# Altium PCB usb_convert.PcbDoc
Units mil, origin at the board's own origin, x right, y up, seen from the top; angles counter-clockwise.
Board outline 640 x 455 mil, 2 copper layers (Top Layer, Bottom Layer); 5 components, 6 nets, 34 pads, 9 vias.
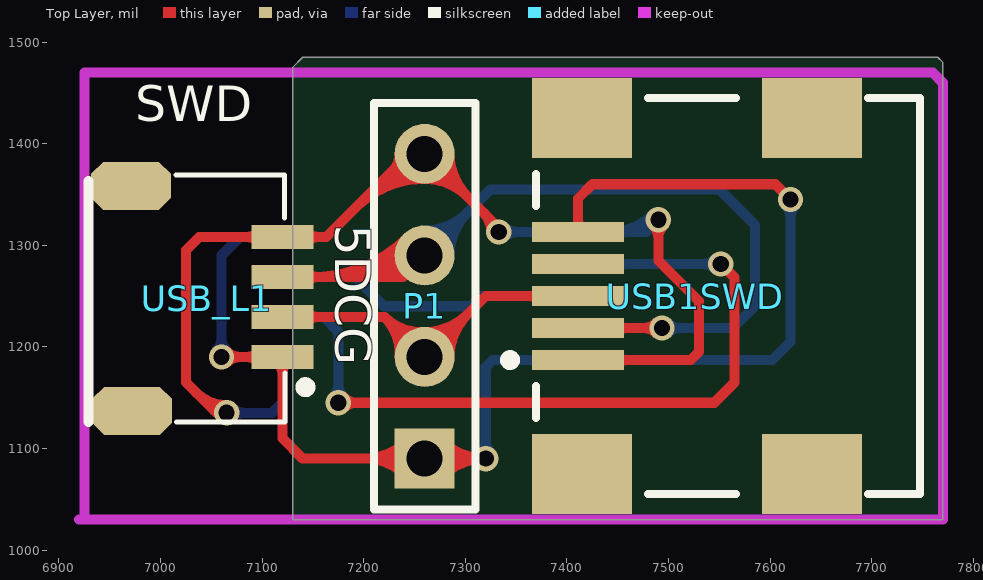
[diagram p0: Top Layer view]
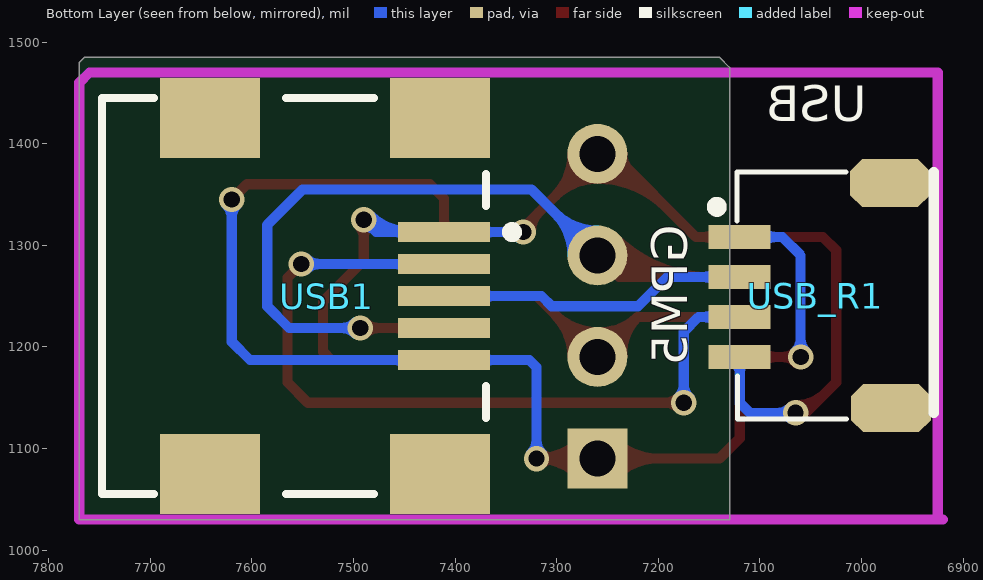
[diagram p1: Bottom Layer view, seen from below]

## Layer stack, top to bottom
Top Layer: signal copper 1.4
Dielectric: dielectric 12.6, FR-4, Dk 4.8
Bottom Layer: signal copper 1.4

## Board outline
7130,1030 7770,1030 7770,1480 7765,1485 7140,1485 7130,1475

## Design rules (kind name [scope] priority, off if disabled: settings)
Clearance [All] p1: gap=10
PolygonConnect [All] p1: connectstyle=Relief reliefconductorwidth=10 reliefentries=4 polygonreliefangle="90 Angle"
RoutingVias [All] p1: holewidth=28 width=50 viastyle="Through Hole" minholewidth=16 minwidth=25 maxholewidth=28 maxwidth=50
SilkscreenOverComponentPads [All] p1: minsilkscreentomaskgap=10
SolderMaskExpansion [All] p1: expansion=4
Width [All] p1: maxlimit=10 minlimit=10 preferedwidth=10
27 further rules are at their usual default settings.

## Components (designator, comment, footprint, x,y, rotation, side; value= is the part's Value field where it differs from the comment)
P1 "Header 4" HDR1X4 7260,1090 r90 top
USB1 "USB-B(Mini)" USB/SM0.8-6H5_M 7720,1250 r0 bottom
USB1SWD "USB-B(Mini)" USB/SM0.8-6H5_M 7720,1250 r0 top
USB_L1 "Header 4" SH1.0-4P 7120,1190 r90 top
USB_R1 "Header 4" SH1.0-4P 7120,1308.11 r270 bottom

## Footprints (in the part's own frame and the unit in brackets; to place one, negate y for a bottom-side part, rotate by r counter-clockwise, add the part's x,y. Pads: shape width x height; smd on the part's side, far side on the other; paste and mask are expansions set on the pad)
HDR1X4 [mm] "Connector; Header; 4 Position"
  rect 1.5x1.5 hole 0.9: 1(0,0)
  round 1.5 hole 0.9: 2(2.54,0) 3(5.08,0) 4(7.62,0)
  silkscreen extent -1.27,-1.27 8.89,1.27
SH1.0-4P [mm]
  rect 0.6x1.55 smd: 1(0,0) 2(1,0) 3(2,0) 4(3,0)
  oct 1.2x2 smd: A(-1.346,3.759) B(4.279,3.785)
  silkscreen extent -1.63,-0.7 4.55,4.85
USB/SM0.8-6H5_M [mm]
  rect 2.3x0.5 smd: 1(-7.85,-1.6) 2(-7.85,-0.8) 3(-7.85,0) 4(-7.85,0.8) 5(-7.85,1.6)
  rect 2.5x2 smd: 6(-7.75,4.45) 7(-1.996,4.45) 8(-7.75,-4.45) 9(-1.996,-4.45)
  silkscreen extent -9.67,-4.95 0.7,4.95

## Part data
P1 USB_L1 USB_R1: "Header, 4-Pin"
USB1 USB1SWD: library part USB5

## Via types
v1: diameter 25, hole 16, Top Layer to Bottom Layer, 9 vias

## Nets (pads, with @x,y where several pads share a name; then routed paths per layer and width w, separated by ;. In a path a pad name is that pad's centre, name@x,y a point inside that pad or via, vN(x,y) a via of type N, cw(c..) or ccw(c..) an arc to the next point about the centre after c; other vN are vias at no path point)
5V: P1.4 USB1.1 USB1SWD.1 USB_L1.4 USB_R1.4 | length 1845.8
  Top Layer w10: 7035.13,1154.87 ccw(c7065,1184.75) v1@7065,1142.5 ; 7052.2,1137.8 ccw(c7065,1150.61) v1@7065,1132.5 ; v1(7065,1135) 7055,1135 7025,1165 7025,1295 7038.11,1308.11 USB_L1.4 7163.11,1308.11 7245,1390 P1.4 7332.99,1317.01 v1(7332.99,1312.99) ; USB_L1.4@7096.48,1303.29 ccw(c7084.86,1291.67) 7084.86,1308.11 ccw(c7084.86,1324.55) USB_L1.4@7096.48,1312.93 ; USB_L1.4@7143.52,1303.29 cw(c7155.14,1291.67) 7155.14,1308.11 cw(c7155.14,1324.55) USB_L1.4@7143.52,1312.93 ; 7192.52,1337.52 cw(c7260,1270.04) 7260,1365.47 cw(c7260,1306.26) 7301.87,1348.13 cw(c7343.74,1390) P1.4@7284.53,1390 ; 7209.59,1354.59 cw(c7260,1304.19) 7260,1375.47 cw(c7260,1340.4) 7284.8,1365.2 cw(c7309.6,1390) P1.4@7274.53,1390 ; 7226.66,1371.66 cw(c7260,1338.33) P1.4@7260,1385.47 ; 7228.74,1373.74 ccw(c7212.47,1390) P1.4@7235.47,1390 ; 7317.35,1332.65 cw(c7297.69,1312.99) v1@7325.49,1312.99 ; USB1SWD.1 7522.01,1187.01 7530,1195 7530,1245 7490,1285 v1(7490,1325) ; USB1SWD.1@7449.8,1183.58 cw(c7458.07,1175.32) 7458.07,1187.01 cw(c7458.07,1198.7) USB1SWD.1@7449.8,1190.43 ; v1@7484.7,1319.7 cw(c7471.89,1306.89) 7490,1306.89 cw(c7508.11,1306.89) v1@7495.3,1319.7
  Bottom Layer w10: v1(7065,1135) 7110,1135 7120,1145 USB_R1.4 ; v1@7070.3,1129.7 cw(c7083.11,1116.89) 7083.11,1135 cw(c7083.11,1153.11) v1@7070.3,1140.3 ; USB_R1.4@7115.18,1185.18 cw(c7103.56,1173.56) 7120,1173.56 cw(c7136.44,1173.56) USB_R1.4@7124.82,1185.18 ; v1(7332.99,1312.99) 7350,1312.99 ; v1@7338.3,1307.69 cw(c7351.1,1294.89) 7351.1,1312.99 cw(c7351.1,1331.1) v1@7338.3,1318.3 ; USB1.1@7372.09,1309.57 ccw(c7363.82,1301.3) 7363.82,1312.99 ccw(c7363.82,1324.68) USB1.1@7372.09,1316.42 ; USB1.1@7442.9,1312.99 ccw(c7442.9,1372.1) v1@7484.7,1330.3 ; USB1.1@7449.8,1309.57 cw(c7458.07,1301.3) 7458.07,1312.99 cw(c7458.07,1324.68) USB1.1@7449.8,1316.42 ; 7467.05,1312.99 ccw(c7467.05,1347.95) v1@7491.77,1323.23 ; v1(7490,1325) 7477.99,1312.99 USB1.1 7350,1312.99 ; 7350,1312.99 cw(c7350,1328.53) 7338.53,1318.05 ccw(c7350,1328.53) 7350,1312.99 ; 7350,1312.99 ccw(c7350,1297.46) 7338.53,1307.93 cw(c7350,1297.46) 7350,1312.99
DM: USB1.2 USB_R1.3 | length 921.4
  Top Layer w10: v1(7175,1145) 7545,1145 7565,1165 7565,1268 v1(7551.5,1281.5) ; v1@7180.3,1139.7 cw(c7193.11,1126.89) 7193.11,1145 cw(c7193.11,1163.11) v1@7180.3,1150.3
  Bottom Layer w10: USB_R1.3 7160.63,1229.37 7175,1215 v1(7175,1145) ; USB_R1.3@7143.52,1224.55 cw(c7155.14,1212.93) 7155.14,1229.37 cw(c7155.14,1245.81) USB_R1.3@7143.52,1234.19 ; v1@7169.7,1150.3 ccw(c7156.89,1163.11) 7175,1163.11 ccw(c7193.11,1163.11) v1@7180.3,1150.3 ; USB1.2 7515,1281.5 v1(7551.5,1281.5) ; USB1.2@7449.8,1278.07 cw(c7458.07,1269.81) 7458.07,1281.5 cw(c7458.07,1293.19) USB1.2@7449.8,1284.92 ; v1@7546.19,1276.19 ccw(c7533.39,1263.39) 7533.39,1281.5 ccw(c7533.39,1299.6) v1@7546.19,1286.8
DP: USB1.3 USB_R1.2 | length 351.2
  Bottom Layer w10: USB_R1.2 7191.26,1268.74 7220,1240 7305,1240 7315,1250 USB1.3 ; USB_R1.2@7143.52,1263.92 cw(c7155.14,1252.3) 7155.14,1268.74 cw(c7155.14,1285.18) USB_R1.2@7143.52,1273.56 ; USB1.3@7372.09,1246.58 ccw(c7363.82,1238.31) 7363.82,1250 ccw(c7363.82,1261.69) USB1.3@7372.09,1253.43
GND: P1.1 USB1.5 USB1SWD.5 USB_L1.1 USB_R1.1 | length 1881.2
  Top Layer w10: v1(7060,1190) USB_L1.1 7120,1110 7140,1090 P1.1 v1(7320,1090) ; v1@7065.3,1184.7 cw(c7078.11,1171.89) 7078.11,1190 cw(c7078.11,1208.11) v1@7065.3,1195.3 ; USB_L1.1@7096.48,1185.18 ccw(c7084.86,1173.56) 7084.86,1190 ccw(c7084.86,1206.44) USB_L1.1@7096.48,1194.82 ; USB_L1.1@7115.18,1185.18 cw(c7103.56,1173.56) 7120,1173.56 cw(c7136.44,1173.56) USB_L1.1@7124.82,1185.18 ; P1.1@7242.66,1072.66 ccw(c7200.79,1030.79) 7200.79,1090 ccw(c7200.79,1149.21) P1.1@7242.66,1107.34 ; P1.1@7249.73,1079.73 ccw(c7224.93,1054.93) 7224.93,1090 ccw(c7224.93,1125.07) P1.1@7249.73,1100.27 ; P1.1@7270.27,1079.73 cw(c7295.07,1054.93) 7295.07,1090 cw(c7295.07,1125.07) P1.1@7270.27,1100.27 ; P1.1@7277.34,1072.66 cw(c7319.21,1030.79) 7319.21,1090 cw(c7319.21,1149.21) P1.1@7277.34,1107.34 ; v1@7314.7,1084.7 ccw(c7301.89,1071.89) 7301.89,1090 ccw(c7301.89,1108.11) v1@7314.7,1095.3 ; USB1SWD.5@7407.52,1316.41 ccw(c7399.25,1324.68) 7410.94,1324.68 ccw(c7422.63,1324.68) USB1SWD.5@7414.37,1316.41 ; USB1SWD.5 7410.94,1345.94 7425,1360 7605,1360 v1(7620,1345)
  Bottom Layer w10: v1@7054.7,1195.3 ccw(c7041.89,1208.11) 7060,1208.11 ccw(c7078.11,1208.11) v1@7065.3,1195.3 ; v1(7060,1190) 7060,1290 7078.11,1308.11 USB_R1.1 ; USB_R1.1@7096.48,1303.29 ccw(c7084.86,1291.67) 7084.86,1308.11 ccw(c7084.86,1324.55) USB_R1.1@7096.48,1312.93 ; v1@7314.7,1095.3 ccw(c7301.89,1108.11) 7320,1108.11 ccw(c7338.11,1108.11) v1@7325.3,1095.3 ; v1(7320,1090) 7320,1180 7327.01,1187.01 USB1.5 7602.01,1187.01 7620,1205 v1(7620,1345) ; USB1.5@7372.09,1183.59 ccw(c7363.82,1175.32) 7363.82,1187.01 ccw(c7363.82,1198.7) USB1.5@7372.09,1190.43 ; USB1.5@7449.8,1183.59 cw(c7458.07,1175.32) 7458.07,1187.01 cw(c7458.07,1198.7) USB1.5@7449.8,1190.43 ; v1@7614.7,1339.7 cw(c7601.89,1326.89) 7620,1326.89 cw(c7638.11,1326.89) v1@7625.3,1339.7
SCK: P1.2 USB1SWD.3 USB_L1.2 | length 659
  Top Layer w10: USB_L1.2 7220.63,1229.37 ; USB_L1.2@7143.52,1224.55 cw(c7155.14,1212.93) 7155.14,1229.37 cw(c7155.14,1245.81) USB_L1.2@7143.52,1234.19 ; P1.2@7235.5,1191.09 ccw(c7184.62,1193.36) 7220.63,1229.37 ; P1.2@7245.49,1190.65 ccw(c7215.36,1191.99) 7236.68,1213.32 ccw(c7258.01,1234.64) P1.2@7259.35,1204.51 ; P1.2@7258.91,1214.5 cw(c7256.64,1265.38) 7220.63,1229.37 ; P1.2@7260,1204.53 ccw(c7260,1239.6) 7284.8,1214.8 ccw(c7309.6,1190) P1.2@7274.53,1190 ; P1.2@7260,1214.53 ccw(c7260,1273.74) 7301.87,1231.87 ccw(c7343.74,1190) P1.2@7284.53,1190 ; USB1SWD.3@7372.09,1246.57 ccw(c7363.82,1238.31) 7363.82,1250 ccw(c7363.82,1261.69) USB1SWD.3@7372.09,1253.42 ; USB1SWD.3 7320,1250 P1.2 7220.63,1229.37
SWD: P1.3 USB1SWD.2 USB_L1.3 | length 1327.7
  Top Layer w10: USB_L1.3 7238.74,1268.74 P1.3 ; USB_L1.3@7143.52,1263.92 cw(c7155.14,1252.3) 7155.14,1268.74 cw(c7155.14,1285.18) USB_L1.3@7143.52,1273.56 ; USB_L1.3@7149.46,1268.74 ccw(c7149.46,1400.54) P1.3@7242.66,1307.34 ; 7173.6,1268.74 ccw(c7173.6,1376.4) P1.3@7249.73,1300.27 ; 7197.74,1268.74 ccw(c7197.74,1352.26) P1.3@7256.8,1293.2 ; 7221.89,1268.74 ccw(c7221.89,1328.11) P1.3@7263.87,1286.13 ; USB1SWD.2 v1(7493.5,1218.5) ; USB1SWD.2@7449.8,1215.08 cw(c7458.07,1206.81) 7458.07,1218.5 cw(c7458.07,1230.19) USB1SWD.2@7449.8,1221.93 ; v1@7488.2,1213.2 ccw(c7475.4,1200.4) 7475.4,1218.5 ccw(c7475.4,1236.61) v1@7488.2,1223.81
  Bottom Layer w10: P1.3 7325,1355 7550,1355 7585,1320 7585,1240 7563.5,1218.5 v1(7493.5,1218.5) ; P1.3@7260,1304.53 ccw(c7260,1339.6) 7284.8,1314.8 ccw(c7309.6,1290) P1.3@7274.53,1290 ; P1.3@7260,1314.53 ccw(c7260,1373.74) 7301.87,1331.87 ccw(c7343.74,1290) P1.3@7284.53,1290 ; v1@7498.81,1213.2 cw(c7511.61,1200.4) 7511.61,1218.5 cw(c7511.61,1236.61) v1@7498.81,1223.81
pads on no net: USB1.4 USB1.6 USB1.7 USB1.8 USB1.9 USB1SWD.4 USB1SWD.6 USB1SWD.7 USB1SWD.8 USB1SWD.9 USB_L1.A USB_L1.B USB_R1.A USB_R1.B

## Keep-outs
Keep-Out Layer:
  lines w10: 6920,1030 7770,1030 7770,1460 7760,1470 6925,1470 6925,1030

## Silkscreen, mask and mechanical layers (free items; w line width, h text height)
Top Overlay:
  text "SWD" at 6975,1410 h60
  text "5DCG" at 7160,1320 h60 r270
Bottom Overlay:
  text "USB" at 6995,1410 h60
  text "GPM5" at 7160,1320 h60 r270